# Altium PCB 底板20160428.PcbDoc (part 5 of 5)
Units mm, origin at the board's own origin, x right, y up, seen from the top; angles counter-clockwise.
Board outline 123.5 x 102.51 mm, 2 copper layers (Top Layer, Bottom Layer); 219 components, 217 nets, 791 pads, 260 vias.
Unrouted connection lines stored in the file: 1.
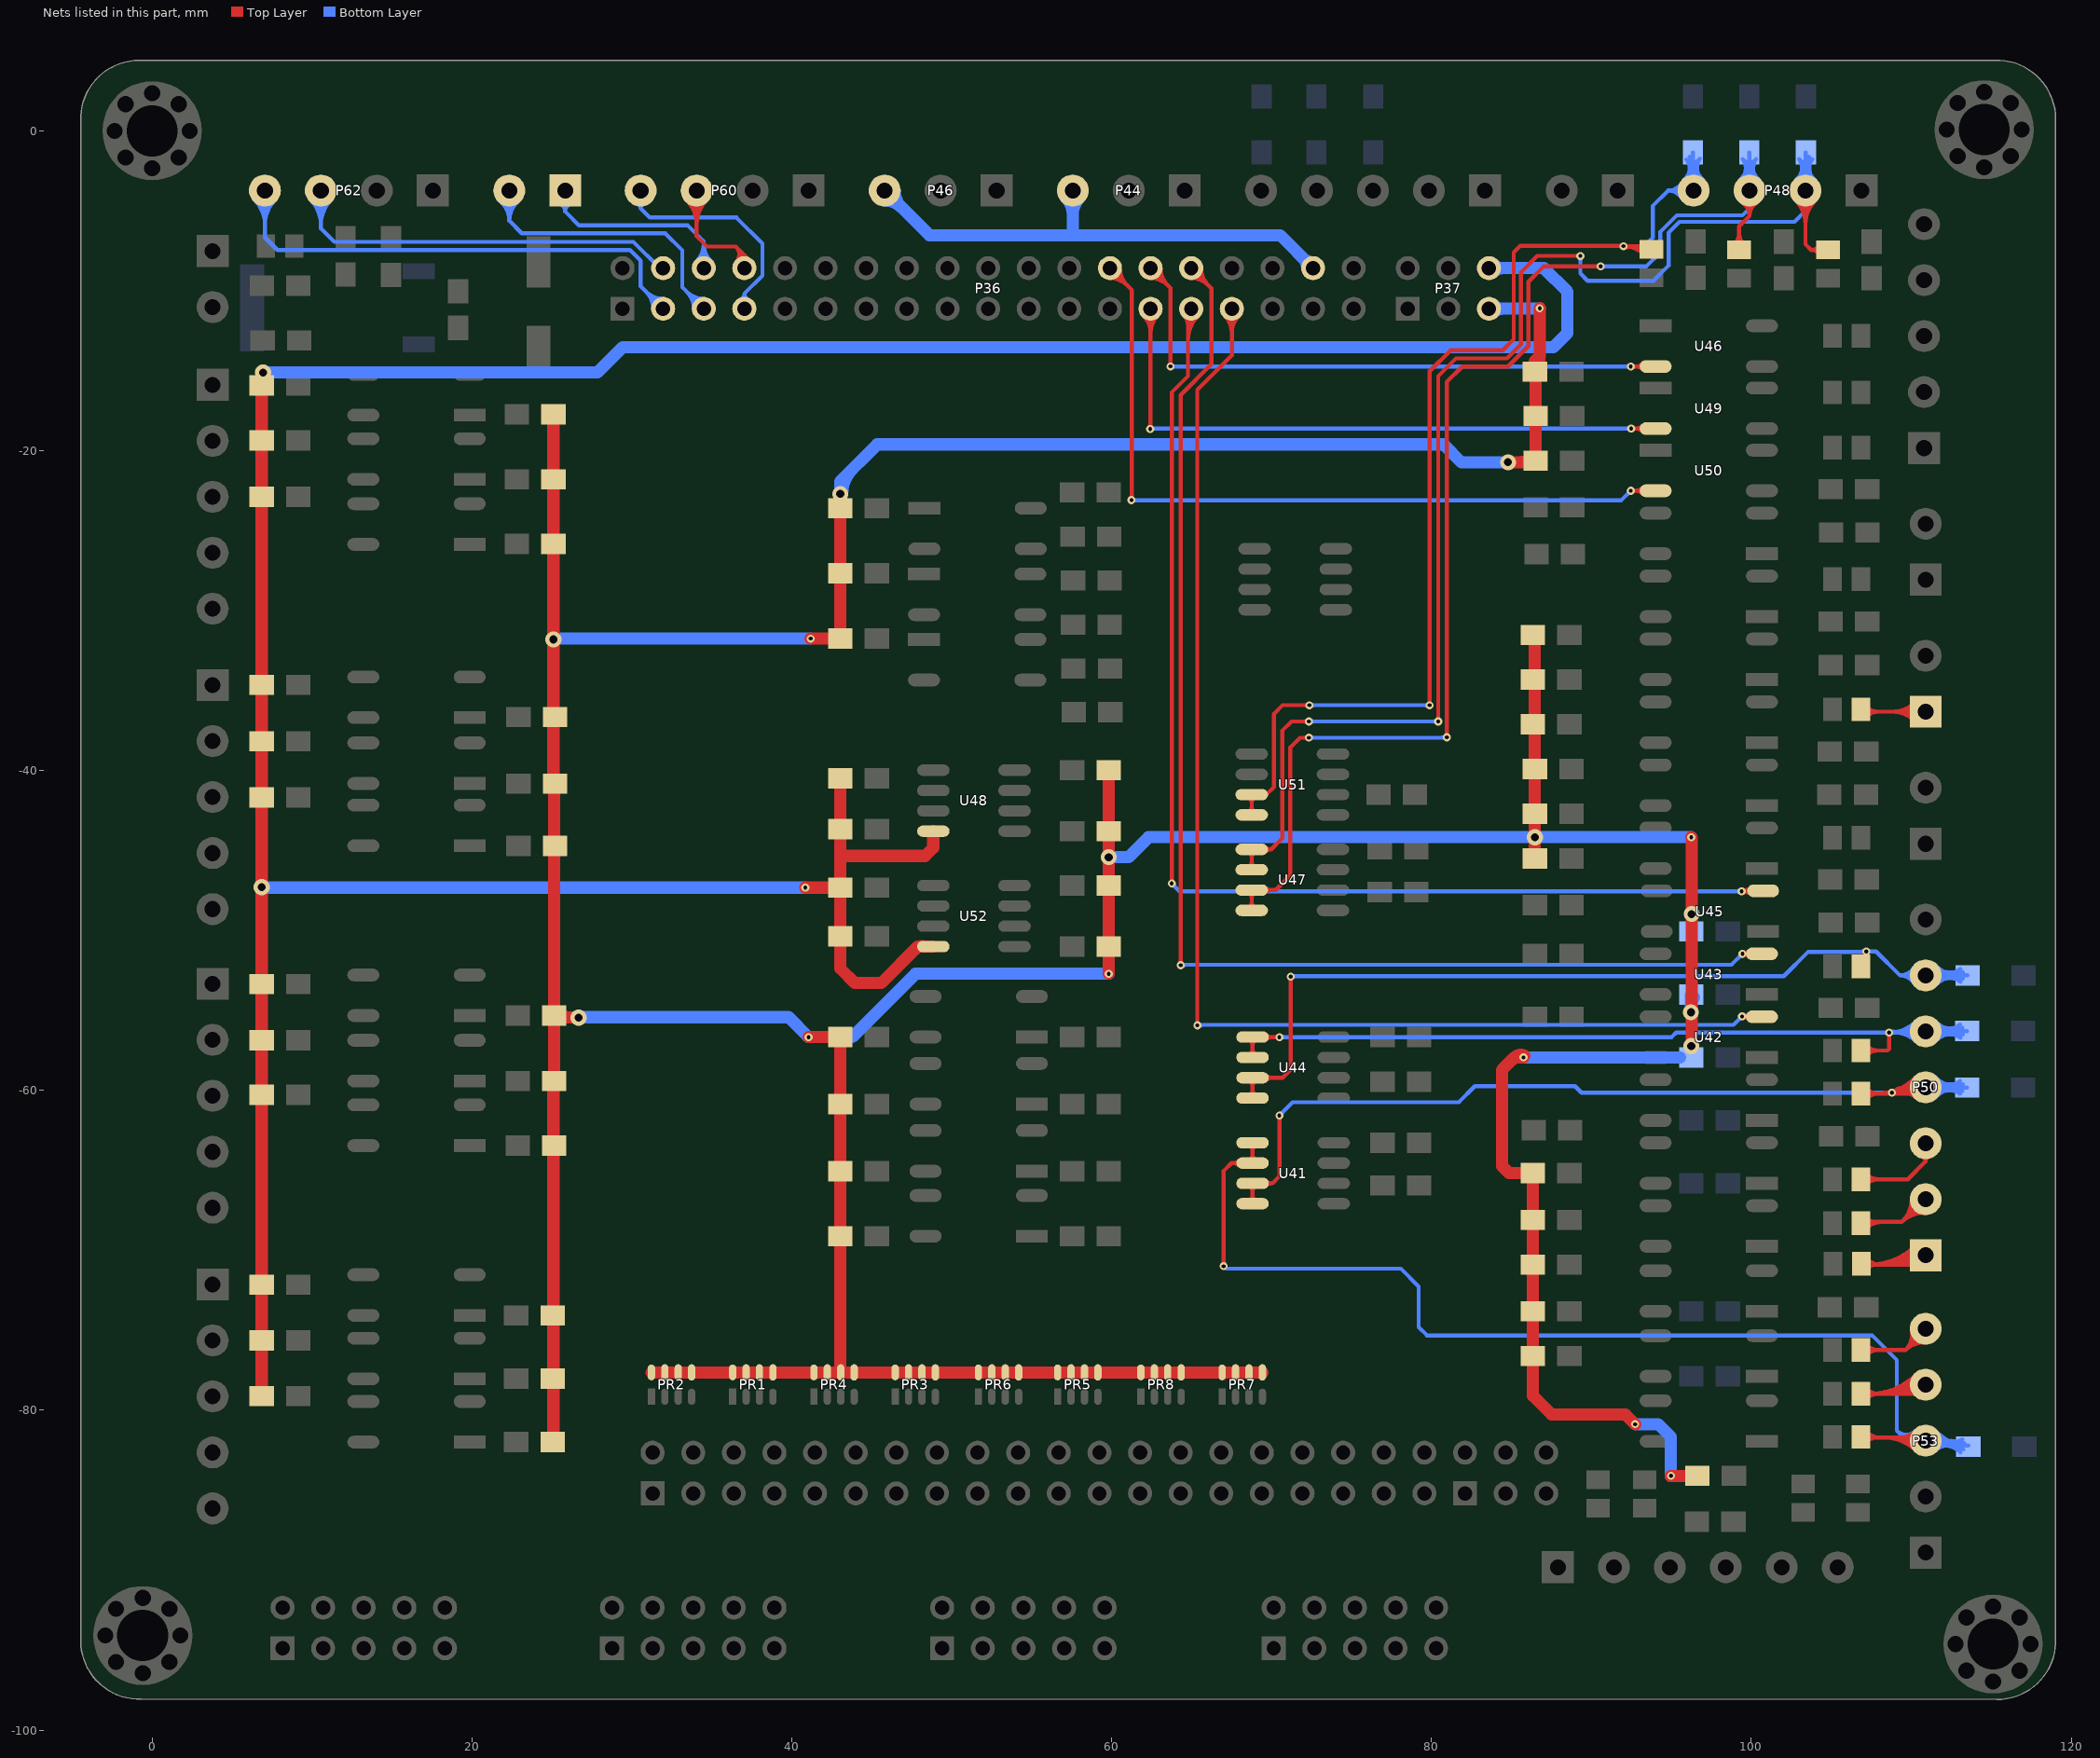
[diagram p5: the nets of this part, all layers, seen from the top]

## Via types
v1: diameter 0.5, hole 0.25, Top Layer to Bottom Layer, 233 vias
v2: diameter 1, hole 0.5, Top Layer to Bottom Layer, 27 vias

## Nets (pads, with @x,y where several pads share a name; then routed paths per layer and width w, separated by ;. In a path a pad name is that pad's centre, name@x,y a point inside that pad or via, vN(x,y) a via of type N, cw(c..) or ccw(c..) an arc to the next point about the centre after c; other vN are vias at no path point) (continued)
QYG_KC11: D39.K D56.1 P53.3 U41.5 U41.6 | length 100.5
  Top Layer w0.254: v1@66.918,-70.906 ccw(c66.708,-70.696) 67.005,-70.696 ccw(c67.302,-70.696) v1@67.092,-70.906 ; v1(67.005,-70.993) 67.005,-65.024 67.488,-64.541 U41.6@68.809,-64.541 U41.5@68.809,-63.271 ; U41.6@67.987,-64.703 ccw(c67.596,-65.093) 67.596,-64.541 ccw(c67.596,-63.99) U41.6@67.987,-64.38 ; U41.6@68.647,-64.38 ccw(c68.257,-63.99) 68.809,-63.99 ccw(c69.36,-63.99) U41.6@68.97,-64.38 ; U41.5@68.647,-63.433 cw(c68.257,-63.823) 68.809,-63.823 cw(c69.36,-63.823) U41.5@68.97,-63.433 ; D39.K@107,-81.52 ccw(c107.462,-81.058) 107.462,-81.712 ; D39.K@107.179,-81.981 cw(c107.83,-82.632) 107.83,-81.712 ; D39.K@107.179,-81.341 ccw(c108.075,-80.445) 108.075,-81.712 ; D39.K@107.29,-81.712 110.632,-81.712 P53.3@110.896,-81.976 ; 108.334,-81.712 cw(c108.334,-84.462) P53.3@110.279,-82.517 ; 108.948,-81.712 cw(c108.948,-83.849) P53.3@110.459,-82.338 ; 109.243,-81.712 ccw(c109.243,-80.247) P53.3@110.279,-81.283 ; 109.561,-81.712 cw(c109.561,-83.236) P53.3@110.638,-82.158 ; 109.856,-81.712 ccw(c109.856,-80.86) P53.3@110.459,-81.462
  Bottom Layer w0.254: v1(67.005,-70.993) 67.158,-71.145 78.08,-71.145 79.197,-72.263 79.197,-74.803 79.712,-75.317 107.55,-75.317 109.093,-76.86 109.093,-81.28 ; 109.273,-81.46 ccw(c109.867,-80.866) P53.3@110.46,-81.461 ; 109.453,-81.64 ccw(c110.047,-81.046) P53.3@110.639,-81.641 ; 109.633,-81.82 ccw(c110.226,-81.227) P53.3@110.818,-81.821 ; 109.813,-82 ccw(c110.406,-81.407) P53.3@110.997,-82.001 ; P53.3@110.034,-81.767 cw(c109.789,-81.729) 109.789,-81.976 ; P53.3@110.069,-82.177 ccw(c109.789,-82.271) 109.789,-81.976 ; P53.3@110.28,-81.281 cw(c109.687,-80.686) 109.093,-81.28 ; P53.3@110.896,-82.205 113.563,-82.205 cw(c113.563,-79.47) P53.3@111.542,-81.312 ; P53.3@110.896,-81.976 109.789,-81.976 ; P53.3@111.166,-81.654 ccw(c112.413,-80.518) 112.413,-82.205 ; P53.3@111.354,-81.483 ccw(c112.988,-79.994) D56.1@112.988,-82.205 ; P53.3@111.514,-82.517 cw(c112.268,-83.272) 112.268,-82.205 ; 112.051,-82.205 cw(c112.051,-83.656) D56.1@113.077,-82.63 ; 112.156,-82.022 ccw(c112.443,-80.718) D56.1@113.163,-81.843 ; 112.307,-82.055 cw(c112.067,-83.147) D56.1@113.008,-82.544 ; 112.369,-82.205 ccw(c112.369,-81.203) D56.1@113.077,-81.911 ; 112.501,-81.92 ccw(c112.734,-81.054) D56.1@113.182,-81.831 ; 112.644,-81.959 cw(c112.4,-82.869) D56.1@113.216,-82.398 ; 112.664,-82.205 cw(c112.664,-83.043) D56.1@113.257,-82.45 ; 112.755,-82.154 ccw(c112.91,-81.448) D56.1@113.3,-82.057 ; 109.093,-81.28 109.789,-81.976
QYG_KR1: D15.K P53.4 | length 16.7
  Top Layer w0.254: D15.K@107.179,-79.289 cw(c107.952,-80.062) 107.952,-78.969 cw(c107.952,-77.875) D15.K@107.179,-78.648 ; D15.K@107.239,-78.969 110.359,-78.969 P53.4@110.874,-78.454 ; D15.K@107.416,-78.969 ccw(c107.416,-74.92) P53.4@110.279,-77.783 ; 108.029,-78.969 ccw(c108.029,-75.533) P53.4@110.459,-77.962 ; 108.642,-78.969 ccw(c108.642,-76.146) P53.4@110.638,-78.142 ; 109.256,-78.969 ccw(c109.256,-76.759) P53.4@110.818,-78.322 ; 109.869,-78.969 ccw(c109.869,-77.373) P53.4@110.998,-78.501
QYG_KR2: D19.K P53.5 | length 10.4
  Top Layer w0.254: D19.K@107.179,-76.546 cw(c107.952,-77.319) 107.952,-76.225 cw(c107.952,-75.132) D19.K@107.179,-75.905 ; D19.K@107.188,-76.225 109.647,-76.225 ; 110,-75.873 ccw(c109.282,-75.155) P53.5@110.285,-74.996 ; P53.5@110.034,-75.036 cw(c108.673,-75.251) 109.647,-76.225 ; 110.046,-75.826 cw(c110.795,-76.575) P53.5@110.859,-75.518 ; P53.5@110.844,-75.771 ccw(c110.75,-77.328) 109.647,-76.225 ; P53.5@110.896,-74.976 109.647,-76.225
RS485_1A: P36.7 P60.4 | length 15.8
  Bottom Layer w0.254: P60.4@30.342,-4.583 cw(c30.28,-4.842) 30.546,-4.842 ; P60.4@30.546,-3.734 30.546,-4.842 ; P60.4@30.75,-4.583 ccw(c30.813,-4.842) 30.546,-4.842 ; P36.7@36.79,-10.552 ccw(c36.635,-10.185) 37.033,-10.185 ; P36.7@37.033,-11.125 37.033,-10.185 ; P36.7@37.276,-10.552 cw(c37.432,-10.185) 37.033,-10.185 ; 30.546,-4.842 31.127,-5.422 36.537,-5.422 38.164,-7.049 38.164,-9.054 37.033,-10.185
RS485_1B: P36.8 P60.3 | length 17.3
  Top Layer w0.254: P60.3@33.429,-4.351 cw(c31.939,-5.841) 34.046,-5.841 cw(c36.154,-5.841) P60.3@34.664,-4.351 ; P60.3@33.609,-4.171 cw(c32.552,-5.228) 34.046,-5.228 cw(c35.541,-5.228) P60.3@34.484,-4.171 ; P60.3@34.046,-3.734 34.046,-6.589 34.696,-7.239 36.5,-7.239 ; P36.8@36.549,-8.193 ccw(c35.995,-7.743) 36.5,-7.239 ; 36.699,-7.438 cw(c36.216,-7.922) P36.8@36.747,-8.353 ; P36.8@36.871,-7.984 ccw(c36.815,-7.772) 37.033,-7.772 ; 36.898,-7.638 cw(c36.436,-8.1) P36.8@36.944,-8.513 ; P36.8@37.033,-8.585 37.033,-7.772 ; 37.098,-7.837 cw(c36.656,-8.279) P36.8@37.141,-8.673 ; P36.8@37.195,-7.984 cw(c37.252,-7.772) 37.033,-7.772 ; 36.5,-7.239 37.033,-7.772
SSD_KC1: P36.28 U46.3 | length 43.7
  Top Layer w0.254: P36.28@62.433,-9.208 cw(c62.433,-10.712) 63.497,-9.649 cw(c64.56,-8.585) P36.28@63.056,-8.585 ; P36.28@62.433,-8.954 cw(c62.433,-9.845) 63.063,-9.215 cw(c63.693,-8.585) P36.28@62.802,-8.585 ; P36.28@62.433,-8.585 63.678,-9.83 v1(63.678,-14.732) ; v1@63.591,-14.645 ccw(c63.381,-14.435) 63.678,-14.435 ccw(c63.975,-14.435) v1@63.765,-14.645 ; v1(92.457,-14.733) U46.3@94.01,-14.733 ; v1@92.544,-14.82 cw(c92.754,-15.03) 92.754,-14.733 cw(c92.754,-14.436) v1@92.544,-14.646 ; U46.3@93.217,-14.926 ccw(c92.751,-15.392) 92.751,-14.733 ccw(c92.751,-14.074) U46.3@93.217,-14.54
  Bottom Layer w0.254: v1(63.678,-14.732) v1(92.457,-14.733) ; v1@63.765,-14.819 cw(c63.975,-15.029) 63.975,-14.732 cw(c63.975,-14.435) v1@63.765,-14.645 ; v1@92.37,-14.82 ccw(c92.16,-15.03) 92.16,-14.733 ccw(c92.16,-14.436) v1@92.37,-14.646
SSD_KC2: P36.27 U49.3 | length 45.2
  Top Layer w0.254: P36.27@61.993,-11.566 cw(c60.929,-12.629) 62.433,-12.629 cw(c63.937,-12.629) P36.27@62.874,-11.566 ; P36.27@62.172,-11.386 cw(c61.542,-12.016) 62.433,-12.016 cw(c63.324,-12.016) P36.27@62.694,-11.386 ; v1@62.321,-18.557 ccw(c62.05,-18.285) 62.433,-18.285 ; v1(62.408,-18.644) 62.433,-18.618 P36.27@62.433,-11.125 ; v1(92.48,-18.619) U49.3@94.01,-18.619 ; v1@92.567,-18.706 cw(c92.777,-18.916) 92.777,-18.619 cw(c92.777,-18.322) v1@92.567,-18.532 ; U49.3@93.217,-18.812 ccw(c92.751,-19.278) 92.751,-18.619 ccw(c92.751,-17.96) U49.3@93.217,-18.426
  Bottom Layer w0.254: v1(62.408,-18.644) 62.432,-18.619 v1(92.48,-18.619) ; v1@92.393,-18.706 ccw(c92.183,-18.916) 92.183,-18.619 ccw(c92.183,-18.322) v1@92.393,-18.532
SSD_KC3: P36.26 U50.3 | length 54.4
  Top Layer w0.254: P36.26@59.893,-9.208 cw(c59.893,-10.712) 60.957,-9.649 cw(c62.02,-8.585) P36.26@60.516,-8.585 ; P36.26@59.893,-8.954 cw(c59.893,-9.845) 60.523,-9.215 cw(c61.153,-8.585) P36.26@60.262,-8.585 ; P36.26@59.893,-8.585 61.265,-9.957 61.265,-23.063 v1(61.239,-23.089) ; v1@61.152,-23.002 ccw(c60.881,-22.73) 61.265,-22.73 ; v1(92.457,-22.505) v1(92.457,-22.505) U50.3@94.01,-22.505 ; v1@92.544,-22.592 cw(c92.754,-22.802) 92.754,-22.505 cw(c92.754,-22.208) v1@92.544,-22.418 ; U50.3@93.217,-22.698 ccw(c92.751,-23.164) 92.751,-22.505 ccw(c92.751,-21.846) U50.3@93.217,-22.312
  Bottom Layer w0.254: v1(61.239,-23.089) 61.265,-23.114 91.848,-23.114 v1(92.457,-22.505) ; v1@61.326,-23.002 ccw(c61.598,-22.73) 61.598,-23.114 ; v1@92.334,-22.505 cw(c92.037,-22.505) 92.247,-22.715 cw(c92.457,-22.925) v1@92.457,-22.628
SSD_KC11: D46.1 D49.K P48.2 U47.5 U47.6 | length 107.4
  Top Layer w0.254: U47.6@68.596,-46.041 ccw(c68.206,-45.651) 68.758,-45.651 ccw(c69.31,-45.651) U47.6@68.919,-46.041 ; U47.5@68.596,-45.094 cw(c68.206,-45.484) 68.758,-45.484 cw(c69.31,-45.484) U47.5@68.919,-45.094 ; U47.6@68.758,-46.203 U47.5@68.758,-44.933 69.977,-44.933 70.663,-44.247 70.663,-37.516 71.247,-36.932 v1@72.314,-36.932 ; U47.5@69.58,-45.094 cw(c69.97,-45.484) 69.97,-44.933 cw(c69.97,-44.381) U47.5@69.58,-44.771 ; v1@72.252,-37.019 ccw(c72.042,-37.229) 72.042,-36.932 ccw(c72.042,-36.635) v1@72.252,-36.845 ; v1(80.416,-36.932) 80.416,-15.342 81.528,-14.23 84.712,-14.23 85.598,-13.344 85.598,-8.839 86.614,-7.823 v1(89.306,-7.823) ; P48.2@102.766,-4.351 cw(c101.276,-5.841) 103.383,-5.841 cw(c105.491,-5.841) P48.2@104.001,-4.351 ; P48.2@102.946,-4.171 cw(c101.889,-5.228) 103.383,-5.228 cw(c104.878,-5.228) P48.2@103.821,-4.171 ; P48.2@103.383,-3.734 103.383,-7.092 103.74,-7.449 ; D49.K@104.274,-7.718 ccw(c103.741,-8.113) 103.741,-7.449 ; D49.K@104.274,-7.18 cw(c103.741,-6.785) 103.741,-7.449 ; D49.K@104.794,-7.449 103.74,-7.449
  Bottom Layer w0.254: v1(72.339,-36.932) 72.343,-36.928 72.347,-36.932 v1(80.416,-36.932) ; v1@72.426,-37.019 cw(c72.636,-37.229) 72.636,-36.932 cw(c72.636,-36.635) v1@72.426,-36.845 ; v1@80.329,-37.019 ccw(c80.119,-37.229) 80.119,-36.932 ccw(c80.119,-36.635) v1@80.329,-36.845 ; v1@89.219,-7.91 cw(c89.009,-8.12) 89.306,-8.12 cw(c89.603,-8.12) v1@89.393,-7.91 ; v1(89.306,-7.823) 89.306,-8.915 89.764,-9.373 93.878,-9.373 94.818,-8.433 94.818,-6.375 95.504,-5.69 102.692,-5.69 103.383,-4.999 ; P48.2@102.766,-3.116 ccw(c101.227,-1.577) D46.1@103.403,-1.577 ; P48.2@102.946,-3.296 ccw(c101.84,-2.191) 103.403,-2.191 ; D46.1@102.981,-1.755 cw(c102.098,-2.346) 103.124,-2.621 ; D46.1@103.044,-1.832 cw(c102.177,-2.7) 103.403,-2.7 cw(c104.63,-2.7) D46.1@103.763,-1.832 ; P48.2@103.074,-4.55 cw(c102.904,-4.999) 103.383,-4.999 ; 103.129,-2.602 cw(c104.225,-2.895) D46.1@103.657,-1.913 ; D46.1@103.149,-1.913 cw(c102.625,-2.821) 103.638,-2.55 ; P48.2@103.383,-3.734 103.383,-4.999 ; P48.2@103.403,-3.714 D46.1@103.403,-1.346 ; 103.403,-2.288 ccw(c104.829,-2.288) P48.2@103.821,-3.296 ; D46.1@103.403,-1.675 ccw(c105.442,-1.675) P48.2@104.001,-3.116 ; D46.1@103.517,-2.099 cw(c104.053,-1.955) D46.1@103.607,-1.625 ; 103.653,-2.607 cw(c104.592,-2.355) D46.1@103.811,-1.776 ; P48.2@103.693,-4.55 ccw(c103.863,-4.999) 103.383,-4.999
SSD_KC22: D48.1 D51.K P48.3 U47.7 U47.8 | length 100
  Top Layer w0.254: U47.8@68.596,-48.581 ccw(c68.206,-48.191) 68.758,-48.191 ccw(c69.31,-48.191) U47.8@68.919,-48.581 ; U47.7@68.596,-47.634 cw(c68.206,-48.024) 68.758,-48.024 cw(c69.31,-48.024) U47.7@68.919,-47.634 ; U47.8@68.758,-48.743 U47.7@68.758,-47.473 70.256,-47.473 71.171,-46.558 71.171,-38.557 71.78,-37.948 v1@72.314,-37.948 ; U47.7@69.58,-47.634 cw(c69.97,-48.024) 69.97,-47.473 cw(c69.97,-46.921) U47.7@69.58,-47.311 ; v1@72.252,-38.035 ccw(c72.042,-38.245) 72.042,-37.948 ccw(c72.042,-37.651) v1@72.252,-37.861 ; v1@80.863,-37.835 ccw(c80.653,-37.625) 80.95,-37.625 ccw(c81.247,-37.625) v1@81.037,-37.835 ; v1@80.95,-37.948 v1(80.95,-37.922) 80.95,-15.704 81.915,-14.738 84.779,-14.738 86.055,-13.462 86.055,-9.434 87.006,-8.484 v1(90.576,-8.484) ; v1@90.489,-8.571 ccw(c90.279,-8.781) 90.279,-8.484 ccw(c90.279,-8.187) v1@90.489,-8.397 ; D51.K@98.911,-7.129 ccw(c98.137,-6.355) 99.231,-6.355 ccw(c100.325,-6.355) D51.K@99.551,-7.129 ; D51.K@99.231,-6.942 99.231,-5.976 99.883,-5.324 ; P48.3@99.415,-4.47 cw(c98.872,-5.324) 99.883,-5.324 ; P48.3@99.551,-4.256 cw(c99.166,-4.861) 99.883,-4.861 cw(c100.6,-4.861) P48.3@100.215,-4.256 ; P48.3@99.883,-3.734 99.883,-5.324 ; P48.3@100.352,-4.47 ccw(c100.894,-5.324) 99.883,-5.324
  Bottom Layer w0.254: v1(72.339,-37.948) v1@80.95,-37.948 ; v1@72.426,-38.035 cw(c72.636,-38.245) 72.636,-37.948 cw(c72.636,-37.651) v1@72.426,-37.861 ; 80.592,-37.948 ccw(c80.592,-37.564) v1@80.863,-37.835 ; v1(90.576,-8.484) 93.421,-8.484 94.31,-7.595 94.31,-6.309 95.336,-5.283 99.441,-5.283 99.883,-4.841 ; v1@90.663,-8.571 cw(c90.873,-8.781) 90.873,-8.484 cw(c90.873,-8.187) v1@90.663,-8.397 ; P48.3@99.266,-3.116 ccw(c97.801,-1.651) D48.1@99.873,-1.651 ; P48.3@99.445,-3.296 ccw(c98.414,-2.265) 99.873,-2.265 ; D48.1@99.461,-1.771 cw(c98.656,-2.353) 99.616,-2.61 ; D48.1@99.514,-1.832 cw(c98.646,-2.7) 99.873,-2.7 cw(c101.099,-2.7) D48.1@100.232,-1.832 ; D48.1@99.619,-1.913 cw(c99.062,-2.877) 100.138,-2.589 ; 99.629,-2.562 cw(c100.661,-2.839) D48.1@100.127,-1.913 ; P48.3@99.68,-4.583 cw(c99.618,-4.841) 99.883,-4.841 ; P48.3@99.873,-3.723 D48.1@99.873,-1.346 ; 99.873,-2.214 ccw(c101.403,-2.214) P48.3@100.321,-3.296 ; D48.1@99.873,-1.601 ccw(c102.016,-1.601) P48.3@100.501,-3.116 ; P48.3@99.883,-3.734 99.883,-4.841 ; P48.3@100.087,-4.583 ccw(c100.149,-4.841) 99.883,-4.841 ; 100.145,-2.617 cw(c101.149,-2.348) D48.1@100.292,-1.76
SSD_KC33: D50.1 D54.K P48.4 U51.7 U51.8 | length 90.1
  Top Layer w0.254: U51.8@68.596,-42.612 ccw(c68.206,-42.222) 68.758,-42.222 ccw(c69.31,-42.222) U51.8@68.919,-42.612 ; U51.7@68.596,-41.665 cw(c68.206,-42.055) 68.758,-42.055 cw(c69.31,-42.055) U51.7@68.919,-41.665 ; U51.8@68.758,-42.774 U51.7@68.758,-41.504 69.672,-41.504 70.155,-41.021 70.155,-36.449 70.688,-35.916 v1@72.314,-35.916 ; v1@72.278,-36.003 ccw(c72.068,-36.213) 72.068,-35.916 ccw(c72.068,-35.619) v1@72.278,-35.829 ; v1(79.883,-35.916) 79.883,-15.037 81.197,-13.722 84.449,-13.722 85.141,-13.03 85.141,-7.595 85.547,-7.188 v1@92.024,-7.188 ; 91.641,-7.188 cw(c91.641,-7.572) v1@91.912,-7.301 ; v1(91.999,-7.214) D54.K@93.447,-7.214 ; v1@92.015,-7.214 cw(c92.015,-8.998) D54.K@93.276,-7.736 ; v1@92.06,-7.32 cw(c92.216,-7.589) 92.296,-7.289 ; v1@92.086,-7.301 cw(c92.296,-7.511) 92.296,-7.214 cw(c92.296,-6.917) v1@92.086,-7.127 ; v1@92.105,-7.152 ccw(c92.35,-7.011) 92.277,-7.284 ; 92.628,-7.214 cw(c92.628,-8.384) D54.K@93.456,-7.557 ; 92.991,-7.214 ccw(c92.991,-6.81) D54.K@93.276,-7.095
  Bottom Layer w0.254: v1(72.365,-35.916) v1(79.883,-35.916) ; v1@72.452,-36.003 cw(c72.662,-36.213) 72.662,-35.916 cw(c72.662,-35.619) v1@72.452,-35.829 ; v1@79.796,-36.003 ccw(c79.586,-36.213) 79.586,-35.916 ccw(c79.586,-35.619) v1@79.796,-35.829 ; v1(91.999,-7.214) 93.294,-7.214 93.828,-6.68 93.828,-4.699 94.793,-3.734 ; v1@92.086,-7.301 cw(c92.296,-7.511) 92.296,-7.214 cw(c92.296,-6.917) v1@92.086,-7.127 ; P48.4@95.647,-4.202 ccw(c94.793,-4.746) 94.793,-3.734 ; P48.4@95.647,-3.265 cw(c94.793,-2.722) 94.793,-3.734 ; P48.4@95.766,-3.116 ccw(c94.375,-1.725) D50.1@96.342,-1.725 ; P48.4@95.861,-4.066 ccw(c95.256,-4.451) 95.256,-3.734 ccw(c95.256,-3.016) P48.4@95.861,-3.401 ; D50.1@95.942,-1.786 cw(c95.21,-2.359) 96.108,-2.6 ; P48.4@95.945,-3.296 ccw(c94.988,-2.338) 96.342,-2.338 ; D50.1@95.983,-1.832 cw(c95.116,-2.7) 96.342,-2.7 cw(c97.569,-2.7) D50.1@96.701,-1.832 ; D50.1@96.089,-1.913 cw(c95.502,-2.932) 96.637,-2.628 cw(c97.712,-2.34) D50.1@96.771,-1.745 ; 96.129,-2.523 cw(c97.098,-2.782) D50.1@96.596,-1.913 ; D50.1@96.142,-1.63 cw(c95.711,-1.967) D50.1@96.24,-2.108 ; P48.4@96.342,-3.693 D50.1@96.342,-1.346 ; 96.342,-2.14 ccw(c97.977,-2.14) P48.4@96.821,-3.296 ; D50.1@96.342,-1.527 ccw(c98.59,-1.527) P48.4@97.001,-3.116 ; P48.4@96.383,-3.734 94.793,-3.734
TXX_KC1: P36.31 U42.3 | length 88.2
  Top Layer w0.254: v1(65.354,-55.931) 65.354,-16.194 67.513,-14.035 P36.31@67.513,-11.125 ; P36.31@67.073,-11.566 cw(c66.009,-12.629) 67.513,-12.629 cw(c69.017,-12.629) P36.31@67.954,-11.566 ; P36.31@67.252,-11.386 cw(c66.622,-12.016) 67.513,-12.016 cw(c68.404,-12.016) P36.31@67.774,-11.386 ; v1@99.46,-55.372 ccw(c99.46,-54.796) U42.3@99.867,-55.203 ; v1@99.477,-55.479 cw(c99.626,-55.736) 99.702,-55.449 cw(c99.779,-55.162) v1@99.522,-55.31 ; v1@99.478,-55.266 ccw(c99.644,-54.984) U42.3@99.729,-55.3 ; v1@99.503,-55.459 cw(c99.713,-55.669) 99.713,-55.372 cw(c99.713,-55.075) v1@99.503,-55.285 ; v1@99.522,-55.433 cw(c99.745,-55.562) U42.3@99.679,-55.313 ; U42.3@99.853,-55.574 ccw(c99.416,-55.946) v1(99.416,-55.372) 100.707,-55.372 U42.3@100.732,-55.396
  Bottom Layer w0.254: v1(65.354,-55.931) 65.38,-55.905 98.882,-55.905 v1(99.416,-55.372) ; v1@65.441,-56.018 cw(c65.712,-56.289) 65.712,-55.905 ; v1@99.293,-55.372 cw(c98.996,-55.372) 99.206,-55.582 cw(c99.416,-55.792) v1@99.416,-55.495
TXX_KC2: P36.30 U43.3 | length 88.7
  Top Layer w0.254: v1@64.226,-52.085 ccw(c64.016,-51.875) 64.313,-51.875 ccw(c64.61,-51.875) v1@64.4,-52.085 ; v1(64.313,-52.172) 64.313,-16.517 66.243,-14.587 66.243,-9.855 P36.30@64.973,-8.585 ; P36.30@64.973,-9.208 cw(c64.973,-10.712) 66.037,-9.649 cw(c67.1,-8.585) P36.30@65.596,-8.585 ; P36.30@64.973,-8.954 cw(c64.973,-9.845) 65.603,-9.215 cw(c66.233,-8.585) P36.30@65.342,-8.585 ; v1@99.503,-51.566 cw(c99.65,-51.816) 99.725,-51.536 cw(c99.8,-51.257) v1@99.548,-51.4 ; v1@99.504,-51.355 ccw(c99.649,-51.11) 99.723,-51.385 ccw(c99.796,-51.66) v1@99.548,-51.521 ; v1@99.528,-51.547 cw(c99.738,-51.757) 99.738,-51.46 cw(c99.738,-51.163) v1@99.528,-51.373 ; U43.3@99.858,-51.276 cw(c99.441,-50.897) v1(99.441,-51.46) ; U43.3@99.859,-51.644 ccw(c99.441,-52.028) v1(99.441,-51.46) ; U43.3@100.66,-51.459 U43.3@100.66,-51.459 v1(99.441,-51.46)
  Bottom Layer w0.254: v1@64.4,-52.259 cw(c64.671,-52.53) 64.671,-52.146 ; v1@64.497,-52.146 98.755,-52.146 v1(99.441,-51.46) ; v1@99.318,-51.46 cw(c99.021,-51.46) 99.231,-51.67 cw(c99.441,-51.88) v1@99.441,-51.583
TXX_KC3: P36.29 U45.3 | length 81.2
  Top Layer w0.254: v1(63.754,-47.066) 63.754,-16.358 64.77,-15.342 64.77,-11.328 P36.29@64.973,-11.125 ; P36.29@64.533,-11.566 cw(c63.96,-12.139) 64.77,-12.139 ; 64.77,-13.12 cw(c66.968,-13.12) P36.29@65.414,-11.566 ; 64.77,-12.507 cw(c66.355,-12.507) P36.29@65.234,-11.386 ; 64.77,-11.893 cw(c65.741,-11.893) P36.29@65.055,-11.207 ; v1(99.39,-47.549) 100.705,-47.549 U45.3@100.732,-47.522 ; v1@99.409,-47.549 ccw(c99.409,-46.8) U45.3@99.939,-47.329 ; v1@99.452,-47.442 ccw(c99.608,-47.171) 99.689,-47.474 ; v1@99.455,-47.653 cw(c99.658,-47.978) U45.3@99.757,-47.608 ; v1@99.477,-47.636 cw(c99.687,-47.846) 99.687,-47.549 cw(c99.687,-47.252) v1@99.477,-47.462 ; v1@99.497,-47.61 cw(c99.74,-47.751) 99.667,-47.48 ; v1@99.536,-47.549 cw(c99.536,-48.118) U45.3@99.939,-47.715
  Bottom Layer w0.254: v1@63.754,-47.189 cw(c63.754,-47.486) 63.964,-47.276 cw(c64.174,-47.066) v1@63.877,-47.066 ; v1(63.754,-47.066) 64.237,-47.549 v1(99.39,-47.549) ; v1@99.303,-47.636 ccw(c99.093,-47.846) 99.093,-47.549 ccw(c99.093,-47.252) v1@99.303,-47.462
TXX_KC11: D40.K D52.1 P50.4 U41.7 U41.8 | length 89.2
  Top Layer w0.254: U41.8@68.647,-66.92 ccw(c68.257,-66.53) 68.809,-66.53 ccw(c69.36,-66.53) U41.8@68.97,-66.92 ; U41.7@68.647,-65.973 cw(c68.257,-66.363) 68.809,-66.363 cw(c69.36,-66.363) U41.7@68.97,-65.973 ; U41.8@68.809,-67.081 U41.7@68.809,-65.811 70.053,-65.811 70.485,-65.38 v1(70.485,-61.57) ; U41.7@69.631,-65.973 cw(c70.021,-66.363) 70.021,-65.811 cw(c70.021,-65.26) U41.7@69.631,-65.65 ; v1@70.398,-61.657 cw(c70.188,-61.867) 70.485,-61.867 cw(c70.782,-61.867) v1@70.572,-61.657 ; D40.K@107.179,-60.518 cw(c107.952,-61.292) 107.952,-60.198 cw(c107.952,-59.104) D40.K@107.179,-59.878 ; D40.K@107.264,-60.198 110.506,-60.198 P50.4@110.896,-59.807 ; 107.845,-60.198 ccw(c107.845,-56.756) P50.4@110.279,-59.19 ; 108.291,-60.136 cw(c108.37,-60.702) v1@108.714,-60.245 ; 108.369,-60.198 ccw(c108.369,-59.728) v1@108.701,-60.06 ; 108.418,-60.2 ccw(c108.394,-59.797) v1@108.696,-60.065 ; 108.459,-60.198 ccw(c108.459,-57.369) P50.4@110.459,-59.369 ; v1@108.846,-60.039 ccw(c109.034,-59.685) 109.151,-60.068 ; v1@108.875,-60.06 ccw(c109.208,-59.728) 109.208,-60.198 ; v1@108.903,-60.19 cw(c109.416,-60.382) 109.189,-59.884 ; 109.072,-60.198 ccw(c109.072,-57.983) P50.4@110.638,-59.549 ; 109.685,-60.198 ccw(c109.685,-58.596) P50.4@110.818,-59.729 ; 109.732,-60.198 cw(c109.732,-60.971) P50.4@110.279,-60.425
  Bottom Layer w0.254: v1(70.485,-61.57) 71.316,-60.738 81.705,-60.738 82.702,-59.741 88.976,-59.741 89.383,-60.147 v1(108.788,-60.147) ; v1@70.485,-61.447 ccw(c70.485,-61.15) 70.695,-61.36 ccw(c70.905,-61.57) v1@70.608,-61.57 ; v1@108.701,-60.234 ccw(c108.491,-60.444) 108.491,-60.147 ccw(c108.491,-59.85) v1@108.701,-60.06 ; v1@108.85,-60.041 ccw(c108.998,-59.783) 109.075,-60.07 ; v1@108.875,-60.234 cw(c109.085,-60.444) 109.085,-60.147 cw(c109.085,-59.85) v1@108.875,-60.06 ; v1@108.895,-60.209 cw(c109.152,-60.357) 109.075,-60.07 ; 109.23,-60.147 ccw(c109.23,-58.838) P50.4@110.361,-59.496 ; 109.61,-60.147 cw(c109.61,-61.094) P50.4@110.279,-60.425 ; 109.671,-60.147 ccw(c109.671,-59.095) P50.4@110.581,-59.624 ; P50.4@110.142,-59.368 cw(c108.788,-58.582) v1(108.788,-60.147) ; P50.4@110.896,-59.807 110.556,-60.147 v1(108.788,-60.147) ; P50.4@110.906,-59.817 D52.1@113.487,-59.817 ; P50.4@111.334,-60.245 cw(c112.367,-61.278) 112.367,-59.817 ; P50.4@111.334,-59.369 ccw(c112.414,-58.289) 112.414,-59.817 ; P50.4@111.514,-60.425 cw(c112.98,-61.891) D52.1@112.98,-59.817 ; P50.4@111.514,-59.19 ccw(c113.028,-57.676) D52.1@113.028,-59.817 ; 112.142,-59.589 ccw(c112.411,-58.541) D52.1@113.057,-59.409 ; 112.161,-60.024 cw(c112.41,-61.011) D52.1@113.044,-60.215 ; 112.345,-59.642 cw(c112.11,-60.556) D52.1@112.923,-60.076 ; 112.366,-59.972 ccw(c112.144,-59.092) D52.1@112.924,-59.557 ; 112.657,-59.722 ccw(c112.819,-59.09) D52.1@113.209,-59.613 ; 112.658,-59.899 cw(c112.812,-60.506) D52.1@113.202,-60.016 ; D52.1@113.001,-60.176 ccw(c112.134,-61.043) 112.134,-59.817 ccw(c112.134,-58.591) D52.1@113.001,-59.458
TXX_KC22: D42.K D53.1 P50.5 U44.5 U44.6 | length 74.2
  Top Layer w0.254: U44.6@68.647,-57.776 ccw(c68.257,-57.386) 68.809,-57.386 ccw(c69.36,-57.386) U44.6@68.97,-57.776 ; U44.5@68.647,-56.829 cw(c68.257,-57.219) 68.809,-57.219 cw(c69.36,-57.219) U44.5@68.97,-56.829 ; U44.6@68.809,-57.937 U44.5@68.809,-56.667 v1(70.485,-56.667) ; U44.5@69.631,-56.829 cw(c70.021,-57.219) 70.021,-56.667 cw(c70.021,-56.116) U44.5@69.631,-56.506 ; v1@70.398,-56.754 ccw(c70.188,-56.964) 70.188,-56.667 ccw(c70.188,-56.37) v1@70.398,-56.58 ; D42.K@107.179,-57.826 cw(c107.952,-58.599) 107.952,-57.506 cw(c107.952,-56.412) D42.K@107.179,-57.185 ; D42.K@107.239,-57.506 108.509,-57.506 108.61,-57.404 v1(108.61,-56.388) ; v1@108.523,-56.475 cw(c108.313,-56.685) 108.61,-56.685 cw(c108.907,-56.685) v1@108.697,-56.475
  Bottom Layer w0.254: v1(70.485,-56.667) 95.021,-56.667 95.301,-56.388 v1(108.61,-56.388) ; v1@70.572,-56.754 cw(c70.782,-56.964) 70.782,-56.667 cw(c70.782,-56.37) v1@70.572,-56.58 ; v1@108.523,-56.475 ccw(c108.313,-56.685) 108.313,-56.388 ccw(c108.313,-56.091) v1@108.523,-56.301 ; v1@108.677,-56.284 ccw(c108.836,-56.034) 108.9,-56.324 ccw(c108.964,-56.614) v1@108.714,-56.454 ; v1@108.697,-56.475 cw(c108.907,-56.685) 108.907,-56.388 cw(c108.907,-56.091) v1@108.697,-56.301 ; 108.984,-56.388 cw(c108.984,-58.22) P50.5@110.279,-56.925 ; 109.219,-56.388 ccw(c109.219,-54.647) P50.5@110.456,-55.872 ; 109.597,-56.388 cw(c109.597,-57.607) P50.5@110.459,-56.745 ; 109.828,-56.388 ccw(c109.828,-55.25) P50.5@110.637,-56.05 ; P50.5@110.276,-55.693 cw(c108.611,-54.045) v1(108.61,-56.388) ; P50.5@110.896,-56.307 110.816,-56.388 v1(108.61,-56.388) ; P50.5@110.917,-56.286 D53.1@113.487,-56.286 ; P50.5@111.334,-56.745 cw(c112.441,-57.852) 112.441,-56.286 ; P50.5@111.334,-55.869 ccw(c112.341,-54.863) 112.341,-56.286 ; P50.5@111.514,-56.925 cw(c113.054,-58.465) D53.1@113.054,-56.286 ; P50.5@111.514,-55.69 ccw(c112.954,-54.25) D53.1@112.954,-56.286 ; 112.131,-56.525 cw(c112.412,-57.61) D53.1@113.064,-56.699 ; 112.172,-56.09 ccw(c112.411,-55.137) D53.1@113.037,-55.895 ; 112.333,-56.473 ccw(c112.091,-55.539) D53.1@112.922,-56.029 ; 112.378,-56.142 cw(c112.162,-57.004) D53.1@112.924,-56.547 ; 112.657,-56.389 cw(c112.824,-57.035) D53.1@113.212,-56.493 ; 112.659,-56.212 ccw(c112.808,-55.618) D53.1@113.198,-56.091 ; D53.1@113.001,-56.646 ccw(c112.134,-57.513) 112.134,-56.286 ccw(c112.134,-55.06) D53.1@113.001,-55.927
TXX_KC33: D43.K D55.1 P50.6 U44.7 U44.8 | length 75.4
  Top Layer w0.254: U44.8@68.647,-60.316 ccw(c68.257,-59.926) 68.809,-59.926 ccw(c69.36,-59.926) U44.8@68.97,-60.316 ; U44.7@68.647,-59.369 cw(c68.257,-59.759) 68.809,-59.759 cw(c69.36,-59.759) U44.7@68.97,-59.369 ; U44.8@68.809,-60.477 U44.7@68.809,-59.207 70.688,-59.207 71.196,-58.699 v1(71.196,-52.883) ; U44.7@69.631,-59.369 cw(c70.021,-59.759) 70.021,-59.207 cw(c70.021,-58.656) U44.7@69.631,-59.046 ; v1@71.109,-52.97 cw(c70.899,-53.18) 71.196,-53.18 cw(c71.493,-53.18) v1@71.283,-52.97 ; D43.K@106.858,-51.894 ccw(c106.857,-51.563) D43.K@107.188,-51.563 ; D43.K@106.857,-51.64 ccw(c106.856,-51.308) v1(107.188,-51.308) 107.188,-52.172 D43.K@107.213,-52.197 ; v1@107.101,-51.395 cw(c106.891,-51.605) 107.188,-51.605 cw(c107.485,-51.605) v1@107.275,-51.395
  Bottom Layer w0.254: v1@71.196,-52.857 102.032,-52.857 103.556,-51.333 107.163,-51.333 v1(107.188,-51.308) 107.798,-51.308 109.297,-52.807 P50.6@110.896,-52.807 D55.1@113.513,-52.807 ; v1@71.283,-52.97 cw(c71.554,-53.241) 71.554,-52.857 ; 106.83,-51.333 ccw(c106.83,-50.95) v1@107.101,-51.221 ; v1@107.275,-51.395 cw(c107.485,-51.605) 107.485,-51.308 cw(c107.485,-51.011) v1@107.275,-51.221 ; P50.6@110.162,-53.279 ccw(c109.297,-53.836) 109.297,-52.807 ccw(c109.297,-51.778) P50.6@110.162,-52.335 ; P50.6@110.376,-53.142 ccw(c109.762,-53.537) 109.762,-52.807 ccw(c109.762,-52.078) P50.6@110.376,-52.472 ; P50.6@111.334,-53.245 cw(c112.392,-54.303) 112.392,-52.807 ; P50.6@111.334,-52.369 ccw(c112.389,-51.314) 112.389,-52.807 ; P50.6@111.514,-53.425 cw(c113.005,-54.916) D55.1@113.005,-52.807 ; P50.6@111.514,-52.19 ccw(c113.003,-50.701) D55.1@113.003,-52.807 ; 112.186,-53.01 cw(c112.432,-53.999) D55.1@113.068,-53.203 ; 112.187,-52.604 ccw(c112.432,-51.619) D55.1@113.068,-52.411 ; 112.388,-52.96 ccw(c112.168,-52.073) D55.1@112.95,-52.545 ; 112.389,-52.654 cw(c112.17,-53.539) D55.1@112.95,-53.069 ; 112.685,-52.886 cw(c112.836,-53.494) D55.1@113.227,-53.005 ; 112.685,-52.728 ccw(c112.835,-52.122) D55.1@113.227,-52.609 ; D55.1@113.026,-53.166 ccw(c112.159,-54.033) 112.159,-52.807 ccw(c112.159,-51.58) D55.1@113.026,-52.447
TXX_KR1: D23.K P50.1 | length 17.9
  Top Layer w0.254: D23.K@107.025,-70.7 ccw(c107.487,-70.238) 107.487,-70.891 ; D23.K@107.205,-71.161 cw(c107.855,-71.812) 107.855,-70.891 ; D23.K@107.205,-70.52 ccw(c108.1,-69.624) 108.1,-70.891 ; D23.K@107.213,-70.891 110.312,-70.891 P50.1@110.896,-70.307 P50.1@110.566,-69.977 ; D23.K@107.378,-70.891 ccw(c107.378,-66.789) P50.1@110.279,-69.69 ; 107.992,-70.891 ccw(c107.992,-67.402) P50.1@110.459,-69.87 ; 108.605,-70.891 ccw(c108.605,-68.016) P50.1@110.638,-70.049 ; 109.218,-70.891 ccw(c109.218,-68.629) P50.1@110.818,-70.229 ; 109.831,-70.891 ccw(c109.831,-69.242) P50.1@110.998,-70.408
TXX_KR2: D27.K P50.2 | length 11.4
  Top Layer w0.254: D27.K@107,-68.441 cw(c107.523,-68.965) 107.523,-68.224 ; D27.K@107.179,-68.621 cw(c108.136,-69.578) 108.136,-68.224 ; D27.K@107.179,-67.98 ccw(c107.768,-67.391) 107.768,-68.224 ; D27.K@107.239,-68.224 109.404,-68.224 ; 109.459,-68.17 ccw(c108.096,-66.807) P50.2@110.023,-66.807 ; 109.804,-67.825 cw(c110.776,-68.798) P50.2@110.859,-67.425 ; 109.893,-67.736 ccw(c108.963,-66.807) P50.2@110.277,-66.807 ; P50.2@110.547,-67.081 109.404,-68.224 ; P50.2@110.844,-67.679 ccw(c110.73,-69.55) 109.405,-68.224
TXX_KR3: D32.K P50.3 | length 7.8
  Top Layer w0.254: D32.K@107.179,-65.878 cw(c107.952,-66.651) 107.952,-65.557 cw(c107.952,-64.464) D32.K@107.179,-65.237 ; D32.K@107.239,-65.557 109.779,-65.557 110.888,-64.448 ; P50.3@110.661,-64.148 cw(c110.576,-64.448) 110.888,-64.448 ; P50.3@110.888,-63.315 110.888,-64.448 ; P50.3@111.117,-64.152 ccw(c111.194,-64.448) 110.888,-64.448
TZ_KR1: D18.K P45.1 | length 11.2
  Top Layer w0.254: D18.K@107.179,-36.645 cw(c107.959,-37.425) 107.959,-36.322 ; D18.K@107.179,-36.004 ccw(c107.946,-35.237) 107.946,-36.322 ; D18.K@107.206,-36.112 107.416,-36.322 P45.1@110.896,-36.322 ; P45.1@110.279,-36.939 ccw(c108.789,-38.43) 108.789,-36.322 ccw(c108.789,-34.214) P45.1@110.279,-35.705 ; P45.1@110.459,-36.76 ccw(c109.402,-37.816) 109.402,-36.322 ccw(c109.402,-34.828) P45.1@110.459,-35.884
U1_RX: P36.5 P42.2 | length 26.2
  Bottom Layer w0.254: P42.2@21.767,-4.4 cw(c20.734,-5.619) 22.332,-5.619 ; P42.2@21.931,-4.206 cw(c21.199,-5.07) 22.332,-5.07 cw(c23.465,-5.07) P42.2@22.732,-4.206 ; P42.2@22.332,-3.734 22.332,-5.619 ; P42.2@22.896,-4.4 ccw(c23.93,-5.619) 22.332,-5.619 ; P36.5@33.87,-11.125 ccw(c32.366,-11.125) 33.43,-10.062 ccw(c34.493,-8.998) P36.5@34.493,-10.502 ; P36.5@34.124,-11.125 ccw(c33.233,-11.125) 33.863,-10.495 ccw(c34.493,-9.865) P36.5@34.493,-10.756 ; P36.5@34.493,-11.125 33.147,-9.779 33.147,-7.468 32.08,-6.401 23.114,-6.401 22.332,-5.619
U1_TX: P36.6 P42.1 | length 17.5
  Bottom Layer w0.254: P42.1@25.49,-4.537 cw(c25.269,-5.055) 25.832,-5.055 ; P42.1@25.832,-3.734 25.832,-5.055 ; P42.1@26.174,-4.537 ccw(c26.394,-5.055) 25.832,-5.055 ; P36.6@34.053,-8.145 ccw(c32.989,-7.081) 34.493,-7.081 ccw(c35.997,-7.081) P36.6@34.934,-8.145 ; P36.6@34.232,-8.324 ccw(c33.602,-7.694) 34.493,-7.694 ccw(c35.384,-7.694) P36.6@34.754,-8.324 ; P36.6@34.493,-8.585 34.493,-6.909 33.503,-5.918 26.695,-5.918 25.832,-5.055
U2_RX: P36.3 P62.4 | length 40
  Bottom Layer w0.254: P62.4@6.434,-4.351 cw(c4.944,-5.841) 7.051,-5.841 cw(c9.159,-5.841) P62.4@7.669,-4.351 ; P62.4@6.614,-4.171 cw(c5.557,-5.228) 7.051,-5.228 cw(c8.546,-5.228) P62.4@7.489,-4.171 ; P62.4@7.051,-3.734 7.051,-6.67 7.835,-7.454 29.882,-7.454 30.544,-8.117 30.544,-9.716 P36.3@31.953,-11.125 ; P36.3@31.33,-11.125 ccw(c29.826,-11.125) 30.89,-10.062 ccw(c31.953,-8.998) P36.3@31.953,-10.502 ; P36.3@31.584,-11.125 ccw(c30.693,-11.125) 31.323,-10.495 ccw(c31.953,-9.865) P36.3@31.953,-10.756
U2_TX: P36.4 P62.3 | length 30.5
  Bottom Layer w0.254: P62.3@9.934,-4.351 cw(c8.444,-5.841) 10.551,-5.841 cw(c12.659,-5.841) P62.3@11.169,-4.351 ; P62.3@10.114,-4.171 cw(c9.057,-5.228) 10.551,-5.228 cw(c12.046,-5.228) P62.3@10.989,-4.171 ; P62.3@10.551,-3.734 10.551,-6.106 11.391,-6.946 30.092,-6.946 31.731,-8.585 P36.4@31.953,-8.585
VCC3.3_B: P36.36 P37.5 P44.3 P46.3 PR1.5 PR1.6 PR1.7 PR1.8 PR2.5 PR2.6 PR2.7 PR2.8 PR3.5 PR3.6 PR3.7 PR3.8 PR4.5 PR4.6 PR4.7 PR4.8 PR5.5 PR5.6 PR5.7 PR5.8 PR6.5 PR6.6 PR6.7 PR6.8 PR7.5 PR7.6 PR7.7 PR7.8 PR8.5 PR8.6 PR8.7 PR8.8 R42.2 R44.2 R49.2 R50.2 R51.2 R53.2 R57.2 R58.2 R59.2 R60.2 R65.2 R66.2 R67.2 R68.2 R73.2 R74.2 R75.2 R76.2 R81.2 R82.2 R83.2 R84.2 R86.2 R88.2 R90.2 R92.2 R94.2 R96.2 R100.2 R104.2 R109.2 R113.2 R115.2 R119.2 R122.2 R125.2 R129.2 R130.2 R136.2 R137.2 R141.2 | length 427.2
  Top Layer w0.762: R90.2@24.865,-81.812 ccw(c24.309,-81.255) 25.095,-81.255 ; R92.2@24.865,-78.208 cw(c24.309,-78.765) 25.095,-78.765 ; R92.2@24.865,-77.849 ccw(c24.309,-77.293) 25.095,-77.293 ; R94.2@24.865,-74.246 cw(c24.309,-74.802) 25.095,-74.802 ; R94.2@24.865,-73.887 ccw(c24.309,-73.331) 25.095,-73.331 ; R68.2@24.89,-40.638 ccw(c24.395,-40.143) 25.095,-40.143 ; R76.2@24.89,-36.832 cw(c24.395,-37.327) 25.095,-37.327 ; R76.2@24.89,-36.473 ccw(c24.395,-35.978) 25.095,-35.978 ; R90.2@25.095,-81.991 R86.2@25.095,-59.512 ; 25.095,-64.185 cw(c25.882,-64.185) R84.2@25.326,-63.629 ; 25.095,-62.713 ccw(c25.882,-62.713) R84.2@25.326,-63.27 ; 25.095,-60.146 cw(c25.882,-60.146) R86.2@25.326,-59.59 ; R53.2@25.095,-17.729 R44.2@25.095,-21.793 R42.2@25.095,-25.832 v2(25.095,-31.801) R76.2@25.095,-36.652 ; R86.2@25.146,-59.411 R88.2@25.146,-55.321 ; 25.146,-45.44 cw(c25.933,-45.44) R60.2@25.376,-44.884 ; 25.146,-43.968 ccw(c25.933,-43.968) R60.2@25.376,-44.524 ; 25.146,-41.554 cw(c25.933,-41.554) R68.2@25.376,-40.997 ; R76.2@25.197,-36.754 R76.2@25.095,-36.652 ; R88.2@25.453,-55.142 ccw(c26.193,-54.401) v2@26.193,-55.448 ; v2(26.67,-55.448) 25.273,-55.448 R88.2@25.146,-55.321 ; PR2.8@31.221,-77.631 PR2.7@32.059,-77.631 PR2.6@32.897,-77.631 PR2.5@33.736,-77.631 PR1.8@36.301,-77.631 PR1.7@37.139,-77.631 PR1.6@37.977,-77.631 PR1.5@38.816,-77.631 PR4.8@41.381,-77.631 PR4.7@42.219,-77.631 PR4.6@43.057,-77.631 ; v1(41.046,-56.667) R81.2@43.028,-56.667 R73.2@43.028,-60.858 R59.2@43.028,-65.049 R51.2@43.028,-69.113 43.028,-77.601 PR4.6@43.057,-77.631 ; v1(41.173,-31.75) R137.2@43.028,-31.75 R141.2@43.028,-27.661 R130.2@43.028,-23.597 v2(43.028,-22.708) ; v1(59.817,-52.705) R136.2@59.817,-51.003 R129.2@59.817,-47.193 v2(59.817,-45.415) R122.2@59.817,-43.79 R115.2@59.817,-39.98 ; PR7.5@69.423,-77.631 PR7.6@68.584,-77.631 PR7.7@67.746,-77.631 PR7.8@66.908,-77.631 PR8.5@64.343,-77.631 PR8.6@63.504,-77.631 PR8.7@62.666,-77.631 PR8.8@61.828,-77.631 PR5.5@59.136,-77.631 PR5.6@58.297,-77.631 PR5.7@57.459,-77.631 PR5.8@56.621,-77.631 PR6.5@54.183,-77.631 PR6.6@53.344,-77.631 PR6.7@52.506,-77.631 PR6.8@51.668,-77.631 PR3.5@48.976,-77.631 PR3.6@48.137,-77.631 PR3.7@47.299,-77.631 PR3.8@46.461,-77.631 PR4.5@43.896,-77.631 PR4.6@43.057,-77.631 ; v2(84.785,-20.726) 86.411,-20.726 R125.2@86.512,-20.625 R119.2@86.512,-17.831 R113.2@86.512,-15.113 ; 85.02,-58.109 cw(c85.75,-58.839) v1@85.75,-57.806 ; 85.527,-20.726 ccw(c85.527,-19.766) R125.2@86.206,-20.445 ; v1(85.75,-57.937) 85.192,-57.937 ; v1@85.801,-57.816 ccw(c85.587,-58.332) 85.192,-57.937 ; R113.2@86.282,-15.242 cw(c85.726,-15.798) 86.512,-15.798 ; R113.2@86.419,-14.873 ccw(c85.726,-14.097) 86.766,-14.097 ; R49.2@86.462,-45.491 v2(86.462,-44.171) R57.2@86.462,-42.697 R65.2@86.462,-39.903 R83.2@86.462,-31.521 ; R113.2@86.462,-15.062 86.462,-14.402 86.766,-14.097 ; v1(86.766,-11.1) 86.766,-14.097 ; v1(92.735,-80.874) 92.126,-80.264 87.503,-80.264 86.335,-79.096 R50.2@86.335,-76.606 R58.2@86.335,-73.812 R66.2@86.335,-70.891 R74.2@86.335,-68.097 R82.2@86.335,-65.176 84.861,-65.176 84.404,-64.719 84.404,-58.725 85.192,-57.937 ; v1(94.971,-84.099) R96.2@96.622,-84.099 ; v2(96.241,-57.226) 96.266,-57.201 v2(96.266,-48.971) 96.266,-44.196 v1(96.241,-44.171) ; R76.2@25.095,-36.652 25.095,-40.818 25.146,-40.869 R88.2@25.146,-55.321
  Bottom Layer w0.762: v2@25.095,-31.75 v1(41.173,-31.75) ; v2@26.695,-55.423 39.802,-55.423 v1(41.046,-56.667) 43.764,-56.667 47.727,-52.705 v1(59.817,-52.705) ; v2(43.028,-22.708) 43.028,-21.92 45.339,-19.609 80.747,-19.609 81.864,-20.726 v2(84.785,-20.726) ; v2@43.147,-22.708 cw(c45.335,-22.708) 43.788,-21.16 ; P46.3@45.807,-4.353 cw(c45.807,-5.847) 46.863,-4.79 cw(c47.92,-3.734) P46.3@46.426,-3.734 ; P46.3@45.807,-3.734 48.601,-6.528 70.536,-6.528 P36.36@72.593,-8.585 ; P44.3@57.129,-4.171 cw(c56.072,-5.228) 57.567,-5.228 cw(c59.061,-5.228) P44.3@58.004,-4.171 ; 57.567,-6.416 P44.3@57.567,-3.734 ; v2(59.817,-45.415) 61.062,-45.415 62.306,-44.171 v2(86.462,-44.171) v1(96.241,-44.171) ; P36.36@72.224,-8.585 ccw(c71.333,-8.585) 71.963,-7.955 ccw(c72.593,-7.325) P36.36@72.593,-8.216 ; P37.5@83.591,-11.125 v1(86.766,-11.1) ; P37.5@83.85,-10.862 ccw(c84.475,-10.227) 84.482,-11.118 ccw(c84.489,-12.009) P37.5@83.854,-11.384 ; v1(85.75,-57.937) R100.2@95.529,-57.937 ; v1(92.735,-80.874) 94.183,-80.874 94.971,-81.661 v1(94.971,-84.099) ; v2(96.215,-55.118) 96.215,-54.026 R104.2@96.241,-54 ; v2@96.215,-54.675 cw(c96.915,-54.675) R104.2@96.42,-54.18
VCC5: P37.6 R43.2 R45.2 R54.2 R61.2 R69.2 R77.2 R85.2 R87.2 R89.2 R91.2 R93.2 R95.2 R117.2 R121.1 R132.2 R134.1 U48.8 U52.8 | length 218.8
  Top Layer w0.762: R91.2@6.85,-79.114 R93.2@6.85,-75.634 R95.2@6.85,-72.155 R85.2@6.85,-60.369 ; R85.2@6.85,-60.267 R87.2@6.85,-56.864 R89.2@6.85,-53.359 v2(6.85,-47.295) R61.2@6.85,-41.675 R69.2@6.85,-38.169 R77.2@6.85,-34.639 R43.2@6.85,-22.879 R45.2@6.85,-19.355 R54.2@6.85,-15.919 v2@6.85,-15.113 ; v1(40.843,-47.32) R132.2@43.028,-47.32 ; R117.2@43.028,-40.488 R121.1@43.028,-43.663 43.028,-45.339 ; 47.707,-51.175 cw(c48.184,-51.652) U52.8@48.184,-50.978 ; U52.8@48.844,-51.003 47.879,-51.003 45.593,-53.289 43.942,-53.289 43.028,-52.375 R134.1@43.028,-50.368 R132.2@43.028,-47.32 ; U48.8@48.844,-43.79 48.844,-44.831 48.336,-45.339 43.028,-45.339 ; R132.2@43.028,-47.32 43.028,-45.339
  Bottom Layer w0.762: v2@6.858,-47.32 v1(40.843,-47.32) ; v2(6.934,-15.113) 27.838,-15.113 29.413,-13.538 87.605,-13.538 88.494,-12.649 88.494,-10.058 87.02,-8.585 P37.6@83.591,-8.585 ; P37.6@83.852,-8.846 cw(c84.482,-9.476) 84.482,-8.585 cw(c84.482,-7.694) P37.6@83.852,-8.324
pads on no net: P1.6

## Polygon pours and split planes (outlines as drawn)
GND24_B on Bottom Layer "Top Layer-No Net" (solid, remove dead copper, pour order 6): -4.521,4.496 119.05,4.496 119.05,-98.12 -4.521,-98.12 -4.521,-0.432 -8.966,4.013 -7.214,2.261 -6.553,2.261 -6.553,2.464 -4.521,4.496
GND24_B on Top Layer "Top Layer-No Net" (hatched 90Degree grid 0.203 track 0.203, remove dead copper, pour order 4): -4.521,4.496 119.05,4.496 119.05,-98.12 -4.521,-98.12 -4.521,4.521

## Keep-outs
Keep-Out Layer:
  circle w0.254: c0,0 r3.2
  circle w0.254: c114.554,0.076 r3.2
  circle w0.254: c115.113,-94.615 r3.2
  circle w0.254: c-0.584,-94.082 r3.2
  lines w0.2: -0.792,4.412 ccw(c-0.792,0.731) -4.47,0.61 -4.47,-94.389 ccw(c-0.79,-94.389) -0.669,-98.067 ; -0.792,4.42 115.222,4.42 ; -0.669,-98.069 115.351,-98.08 ; 115.222,4.415 cw(c115.344,0.737) 119.024,0.737 ; 115.351,-98.087 ccw(c115.351,-94.406) 119.03,-94.285 119.03,0.737

## Silkscreen, mask and mechanical layers (free items; w line width, h text height)
Top Overlay:
  text "RX" at 20.269,-7.061 h2
  text "TX" at 25.019,-7.061 h2
  text "红" at 68.25,-7.112 h2
  text "A" at 29.642,-7.137 h2
  text "触摸屏485" at 31.725,-7.163 h2
  text "电位器2" at 46.482,-7.163 h2
  text "电位器1" at 58.09,-7.163 h2
  text "绿" at 72.212,-7.163 h2
  text "黄" at 75.616,-7.163 h2
  text "CAN_L" at 85.928,-7.29 h2
  text "PWM1" at 5.791,-27.254 h2
  text "GND" at 5.791,-30.658 h2
  text "PWM2" at 5.791,-46.076 h2
  text "GND" at 5.791,-49.479 h2
  text "PWM3" at 5.791,-64.618 h2
  text "GND" at 5.791,-68.021 h2
  text "PWM4" at 5.791,-83.363 h2
  text "GND" at 5.791,-86.766 h2
Bottom Overlay:
  text "+24V" at 16.637,-1.956 h2 r270
  text "GND" at 13.081,-1.981 h2 r270
  text "+24V" at 105.918,-2.261 h2 r270
  text "地标RX" at 6.198,-2.438 h2 r270
  text "地标TX" at 9.627,-2.438 h2 r270
  text "YY_TX" at 24.968,-2.464 h2 r270
  text "YY_RX" at 21.412,-2.515 h2 r270
  text "3.3V" at 44.882,-2.515 h2 r270
  text "+24V" at 82.398,-2.565 h2 r270
  text "+24V" at 40.03,-2.591 h2 r270
  text "GND" at 78.892,-2.591 h2 r270
  text "电位器1" at 60.046,-2.616 h2 r270
  text "CAN_H" at 90.653,-2.616 h2 r270
  text "GND" at 36.652,-2.642 h2 r270
  text "3.3V" at 56.617,-2.642 h2 r270
  text "CMP-B" at 33.045,-2.667 h2 r270
  text "CAN_L" at 87.147,-2.667 h2 r270
  text "CMP-A" at 29.591,-2.692 h2 r270
  text "电位器2" at 48.285,-2.692 h2 r270
  text "GND" at 112.497,-4.902 h2 r180
  text "VCC" at 2.057,-8.077 h2
  text "+24V" at 112.471,-8.458 h2 r180
  text "GND" at 2.134,-11.633 h2
  text "开入3" at 117.246,-14.046 h2
  text "M1使能" at 2.235,-16.942 h2
  text "开入2" at 117.246,-17.475 h2
  text "M1方向" at 2.159,-20.345 h2
  text "开入1" at 117.119,-20.879 h2
  text "M1刹车" at 2.261,-23.952 h2
  text "GND" at 112.649,-24.105 h2 r180
  text "PWM1" at 2.21,-27.407 h2
  text "启动" at 116.688,-29.235 h2
  text "GND" at 2.261,-30.937 h2
  text "GND" at 112.293,-32.461 h2 r180
  text "M2使能" at 2.311,-35.839 h2
  text "停止" at 116.408,-37.44 h2
  text "M2方向" at 2.388,-39.268 h2
  text "GND" at 112.319,-40.564 h2 r180
  text "M2刹车" at 2.413,-42.774 h2
  text "急停" at 116.307,-45.72 h2
  text "PWM2" at 2.464,-46.177 h2
  text "GND" at 112.471,-48.92 h2 r180
  text "GND" at 2.515,-49.682 h2
  text "M3使能" at 2.362,-54.458 h2
  text "M3方向" at 2.337,-57.81 h2
  text "M3刹车" at 2.286,-61.214 h2
  text "开入3" at 117.297,-64.313 h2
  text "PWM3" at 2.261,-64.694 h2
  text "开入2" at 117.323,-67.767 h2
  text "GND" at 2.134,-68.326 h2
  text "开入1" at 117.17,-71.425 h2
  text "M4使能" at 2.388,-73.279 h2
  text "牵开入2" at 118.796,-76.073 h2
  text "M4方向" at 2.515,-76.733 h2
  text "牵开入1" at 118.643,-79.629 h2
  text "M4刹车" at 2.515,-80.239 h2
  text "PWM4" at 2.464,-83.668 h2
  text "GND" at 112.471,-84.607 h2 r180
  text "IO板V1.2-20160928" at 24.892,-85.573 h2
  text "GND" at 2.438,-87.173 h2
  text "+24V" at 112.497,-87.935 h2 r180
  text "http://www.chenghe.info/" at 27.127,-88.163 h2
  text "+24V" at 88.367,-91.643 h2 r90
  text "避障1" at 105.893,-91.669 h2 r90
  text "GND" at 91.897,-91.719 h2 r90
  text "避障2" at 97.307,-91.745 h2 r90